# Altium PCB PCB2.PcbDoc
Units mil, origin at the board's own origin, x right, y up, seen from the top; angles counter-clockwise.
Board outline 6000 x 4000 mil, 2 copper layers (Top Layer, Bottom Layer); 11 components, 7 nets, 23 pads, 0 vias.
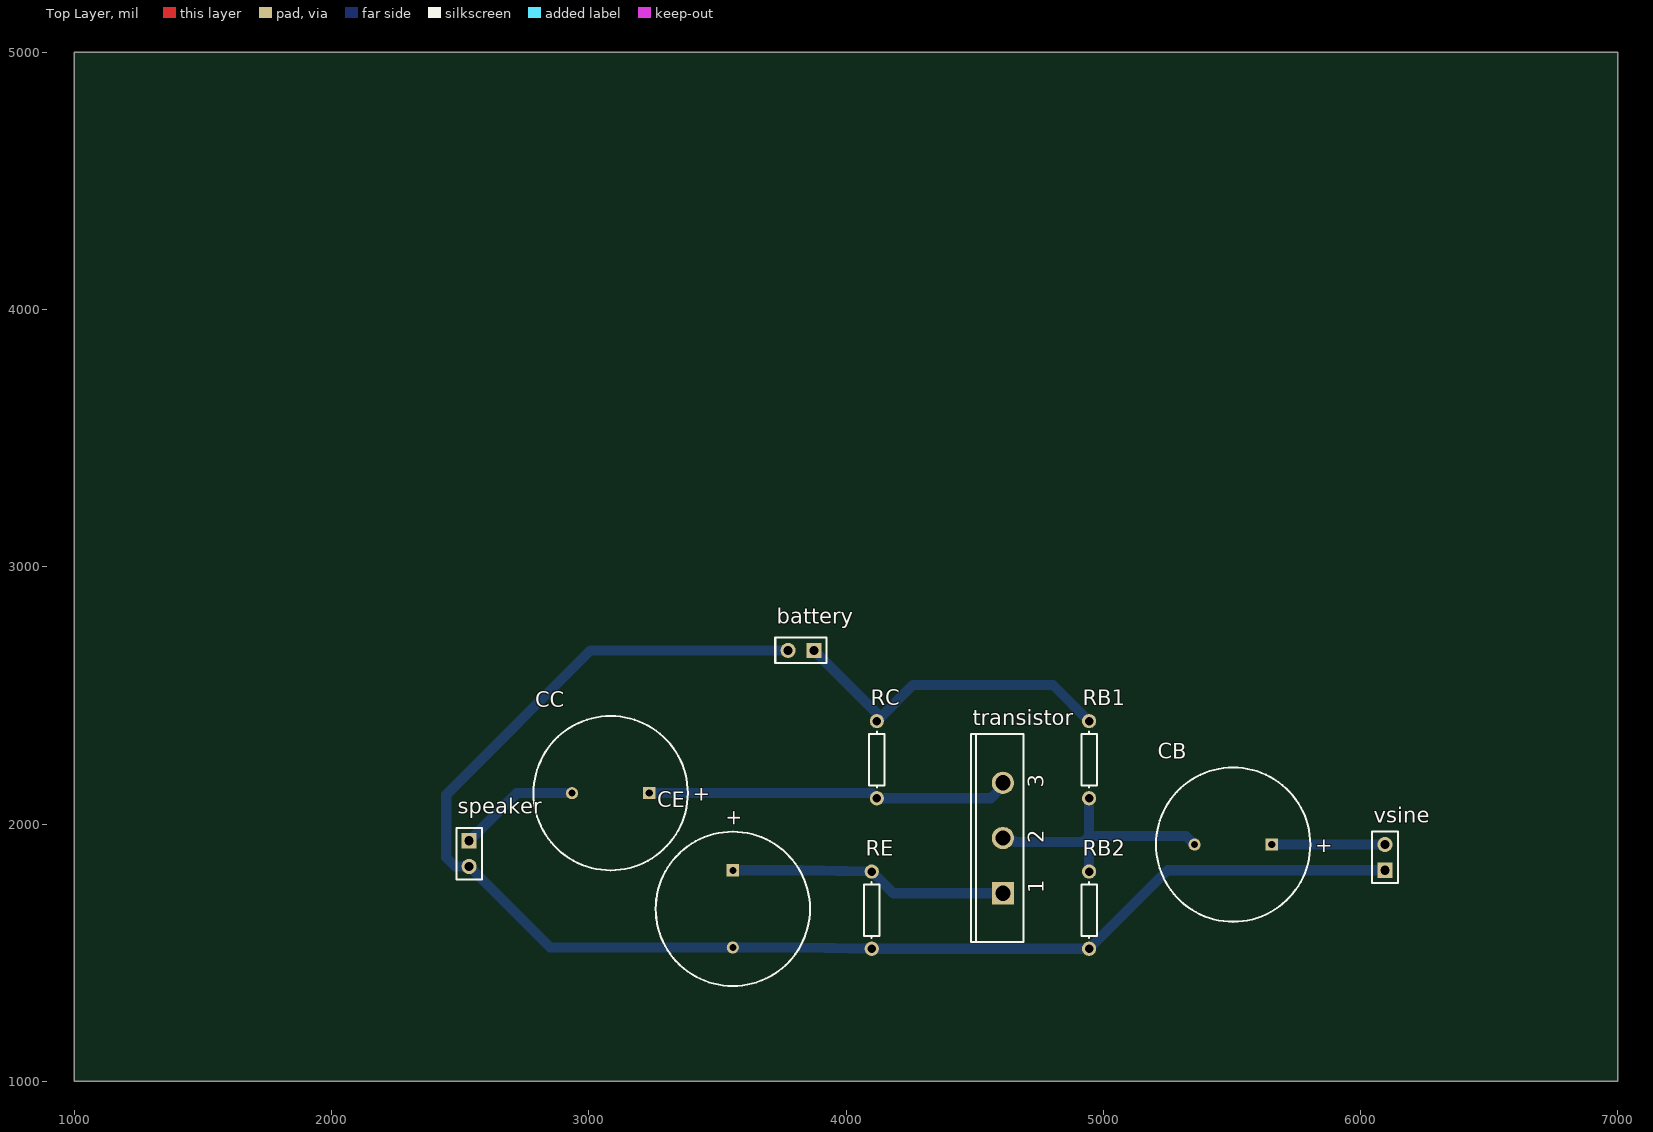
[diagram p0: Top Layer view]
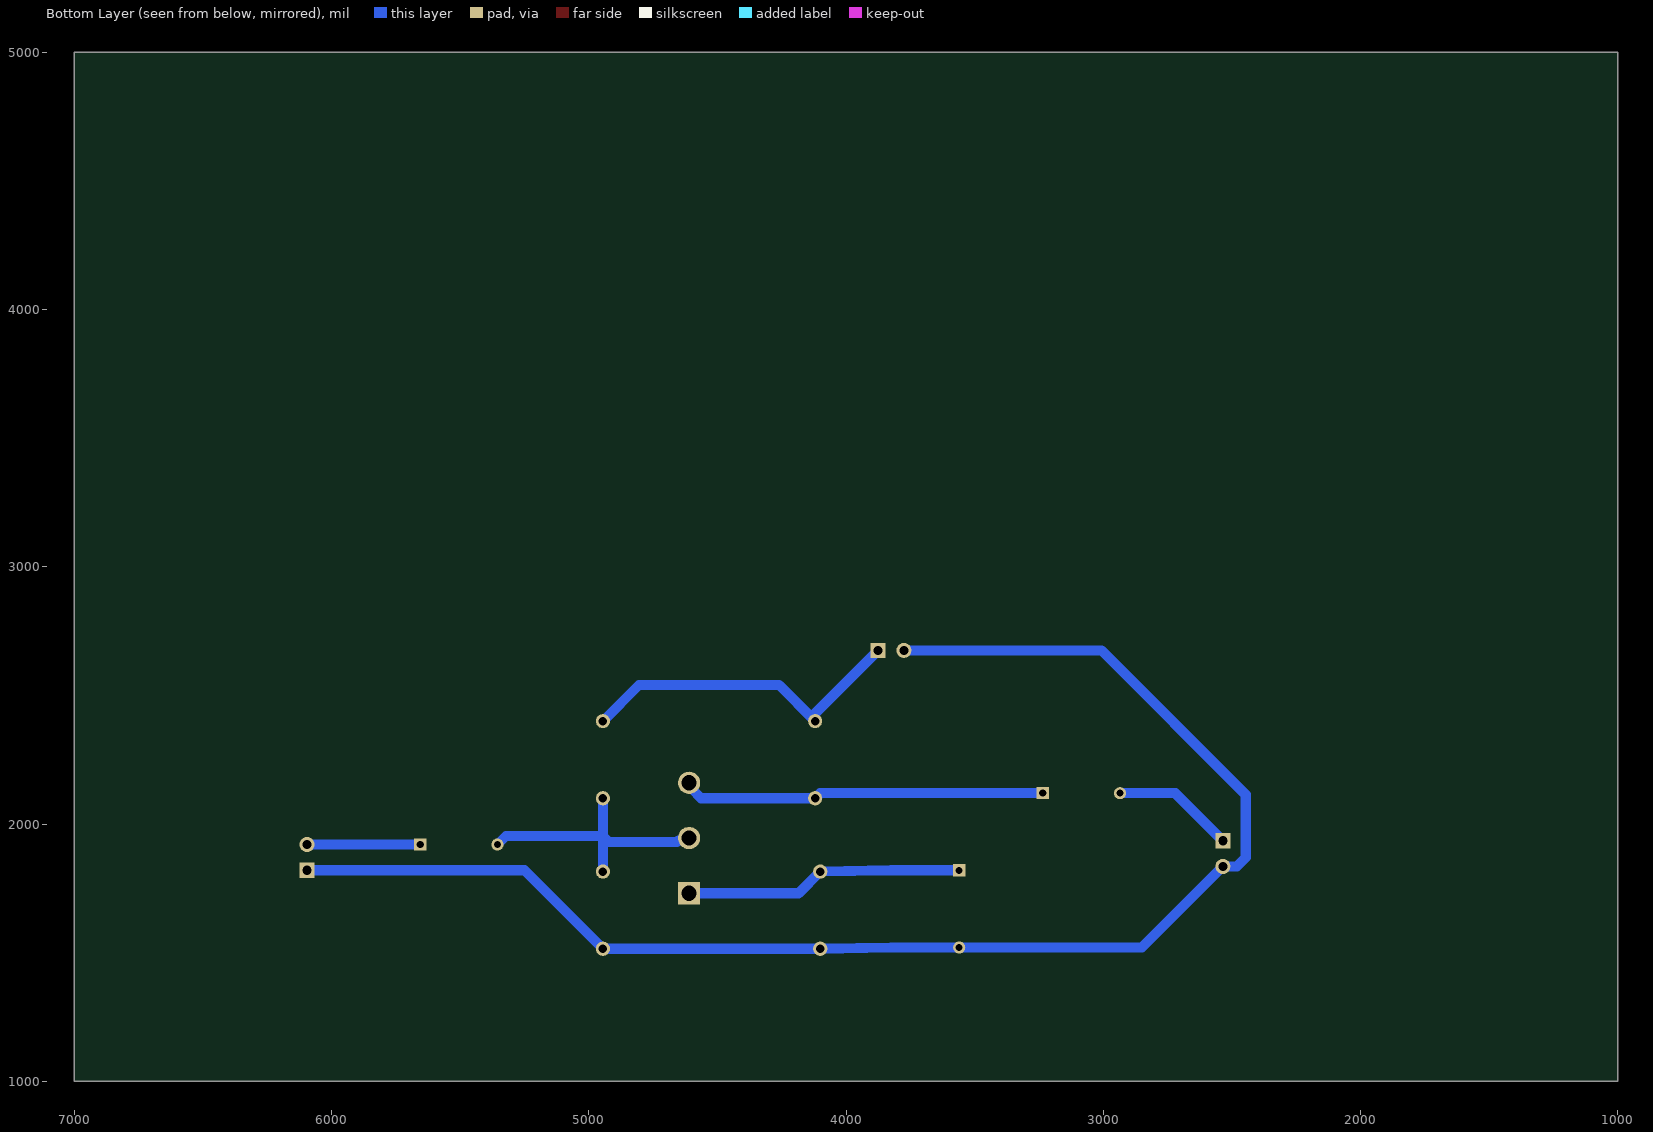
[diagram p1: Bottom Layer view, seen from below]

## Layer stack, top to bottom
Top Solder: solder mask 0.4, Solder Resist, Dk 3.5
Top Layer: signal copper 1.4
Dielectric 1: dielectric 12.6, FR-4, Dk 4.8
Bottom Layer: signal copper 1.4
Bottom Solder: solder mask 0.4, Solder Resist, Dk 3.5

## Board outline
1000,1000 7000,1000 7000,5000 1000,5000

## Design rules (kind name [scope] priority, off if disabled: settings)
Clearance [All] p1: gap=39.37 ignorepadtopadclearanceinfootprint=FALSE
PolygonConnect [All] p1: connectstyle=Direct reliefconductorwidth=10 reliefentries=4 polygonreliefangle="90 Angle" airgapwidth=10
RoutingLayers [All] p1: top layer_v5=FALSE bottom layer_v5=TRUE
RoutingVias [All] p1: holewidth=28 width=50 viastyle="Through Hole" minholewidth=28 minwidth=50 maxholewidth=28 maxwidth=50
SolderMaskExpansion [All] p1: expansion=4 istentingtop=FALSE
Width [All] p1: maxlimit=39.37 minlimit=39.37 preferedwidth=39.37
29 further rules are at their usual default settings.

## Components (designator, comment, footprint, x,y, rotation, side; value= is the part's Value field where it differs from the comment)
battery "Header 2" HDR1X2 3875,2675 r180 top
CB "Cap Pol1" RB7.6-15 5505,1920 r0 top value=100pF
CC "Cap Pol1" RB7.6-15 3085,2120 r0 top value=100pF
CE "Cap Pol1" RB7.6-15 3560,1670 r90 top value=100pF
RB1 "Res1" AXIAL-0.3 4945,2250 r90 top value=1K
RB2 "Res1" AXIAL-0.3 4945,1665 r90 top value=1K
RC "Res1" AXIAL-0.3 4120,2250 r90 top value=1K
RE "Res1" AXIAL-0.3 4100,1665 r90 top value=1K
speaker "Header 2" HDR1X2 2535,1935 r270 top
transistor "IGBT-P" TO-264-AA 4610,1945.43 r90 top
vsine "Header 2" HDR1X2 6095,1820 r90 top

## Footprints (in the part's own frame and the unit in brackets; to place one, negate y for a bottom-side part, rotate by r counter-clockwise, add the part's x,y. Pads: shape width x height; smd on the part's side, far side on the other; paste and mask are expansions set on the pad)
AXIAL-0.3 [mm] "Axial Device, Thru-Hole; 2 Leads; 0.3 in Pin Spacing"
  round 1.4 hole 0.85: 1(-3.81,0) 2(3.81,0)
  silkscreen extent -2.77,-0.76 2.77,0.76
HDR1X2 [mm] "Connector; Header; 2 Position"
  rect 1.5x1.5 hole 0.9: 1(0,0)
  round 1.5 hole 0.9: 2(2.54,0)
  silkscreen extent -1.27,-1.27 3.81,1.27
RB7.6-15 [mm] "Polarized Capacitor (Radial); 2 Leads"
  rect 1.2x1.2 hole 0.7: 1(3.81,0)
  round 1.2 hole 0.7: 2(-3.81,0)
  silkscreen extent -7.62,-7.62 7.62,7.62
TO-264-AA [mm] "SIP with Mounting Hole; 3 Leads; Body 26 x 20 x 5 mm (typ); Pitch 5.45 mm"
  rect 2.2x2.2 hole 1.5: 1(-5.45,0)
  round 2.2 hole 1.5: 2(0,0) 3(5.45,0)
  silkscreen extent -10.25,-2.05 10.25,3.15

## Part data
battery speaker vsine: "Header, 2-Pin", LatestRevisionDate=17-Jul-2002, LatestRevisionNote="Re-released for DXP Platform.", Publisher="Altium Limited"
CB CC CE: "Polarized Capacitor (Radial)", LatestRevisionDate=17-Jul-2002, LatestRevisionNote="Re-released for DXP Platform.", PackageDescription="Polarized Capacitor (Radial); 2 Leads", PackageReference=RB7.6-15, Published=8-Jun-2000, Publisher="Altium Limited"
RB1 RB2 RC RE: "Resistor", LatestRevisionDate=17-Jul-2002, LatestRevisionNote="Re-released for DXP Platform.", PackageDescription="Axial Device, Thru-Hole; 2 Leads; 0.3 in Pin Spacing", PackageReference=AXIAL-0.3, Published=8-Jun-2000, Publisher="Altium Limited"
transistor: "PNP Bipolar Junction Transistor", Code_JEDEC=TO-264-AA, LatestRevisionDate=17-Jul-2002, LatestRevisionNote="Re-released for DXP Platform.", PackageReference=TO-264-AA, Published=8-Jun-2000, Publisher="Altium Limited"

## Nets (pads, with @x,y where several pads share a name; then routed paths per layer and width w, separated by ;. In a path a pad name is that pad's centre, name@x,y a point inside that pad or via, vN(x,y) a via of type N, cw(c..) or ccw(c..) an arc to the next point about the centre after c; other vN are vias at no path point)
GND: battery.2 CE.2 RB2.1 RE.1 speaker.2 vsine.1 | length 5725.7
  Bottom Layer w39.37: battery.2 3007,2675 2446,2114 2446,1870 2481,1835 speaker.2 2850,1520 CE.2 3825,1520 RE.1 RB2.1 5250,1820 vsine.1
Netbattery_1: battery.1 RB1.2 RC.2 | length 1317.5
  Bottom Layer w39.37: battery.1 4120,2430 RC.2 4260,2540 4805,2540 RB1.2
NetCB_1: CB.1 vsine.2 | length 440
  Bottom Layer w39.37: CB.1 vsine.2
NetCB_2: CB.2 RB1.1 RB2.2 transistor.2 | length 1056.3
  Bottom Layer w39.37: transistor.2@4612.96,1930 4619.36,1936.39 4650.29,1936.39 4656.68,1930 4921.94,1930 4945,1953.06 4945,1953.6 5321.4,1953.6 CB.2 ; RB2.2 RB1.1
NetCC_1: CC.1 RC.1 transistor.3 | length 1415.9
  Bottom Layer w39.37: CC.1 4100,2120 RC.1 4563.32,2100 4600.96,2137.64 4600.96,2150.96 transistor.3
NetCC_2: CC.2 speaker.1 | length 476.6
  Bottom Layer w39.37: speaker.1 2720,2120 CC.2
NetCE_1: CE.1 RE.2 transistor.1 | length 1084.9
  Bottom Layer w39.37: CE.1 3825,1820 RE.2 4184.13,1730.87 transistor.1

## Dimensions
2380,2845.03 to 2375,1345.03 on Bottom Layer
2370,2860 to 6310,2855 on Bottom Layer

## Text inside footprints (layer, text, board x,y; h text height)
CB: Top Overlay "+" at 5825.15,1890.99 h59.06
CC: Top Overlay "+" at 3405.15,2090.99 h59.06
CE: Top Overlay "+" at 3589.01,1990.15 h59.06 r90
transistor: Top Overlay "3" at 4768.46,2140 h59.06 r90; Top Overlay "2" at 4768.46,1925.43 h59.06 r90; Top Overlay "1" at 4768.46,1730.87 h59.06 r90